# EAGLE board Transceiver Module Dev Board（without MCU）_V1.0 (EAGLE 9.6.2)
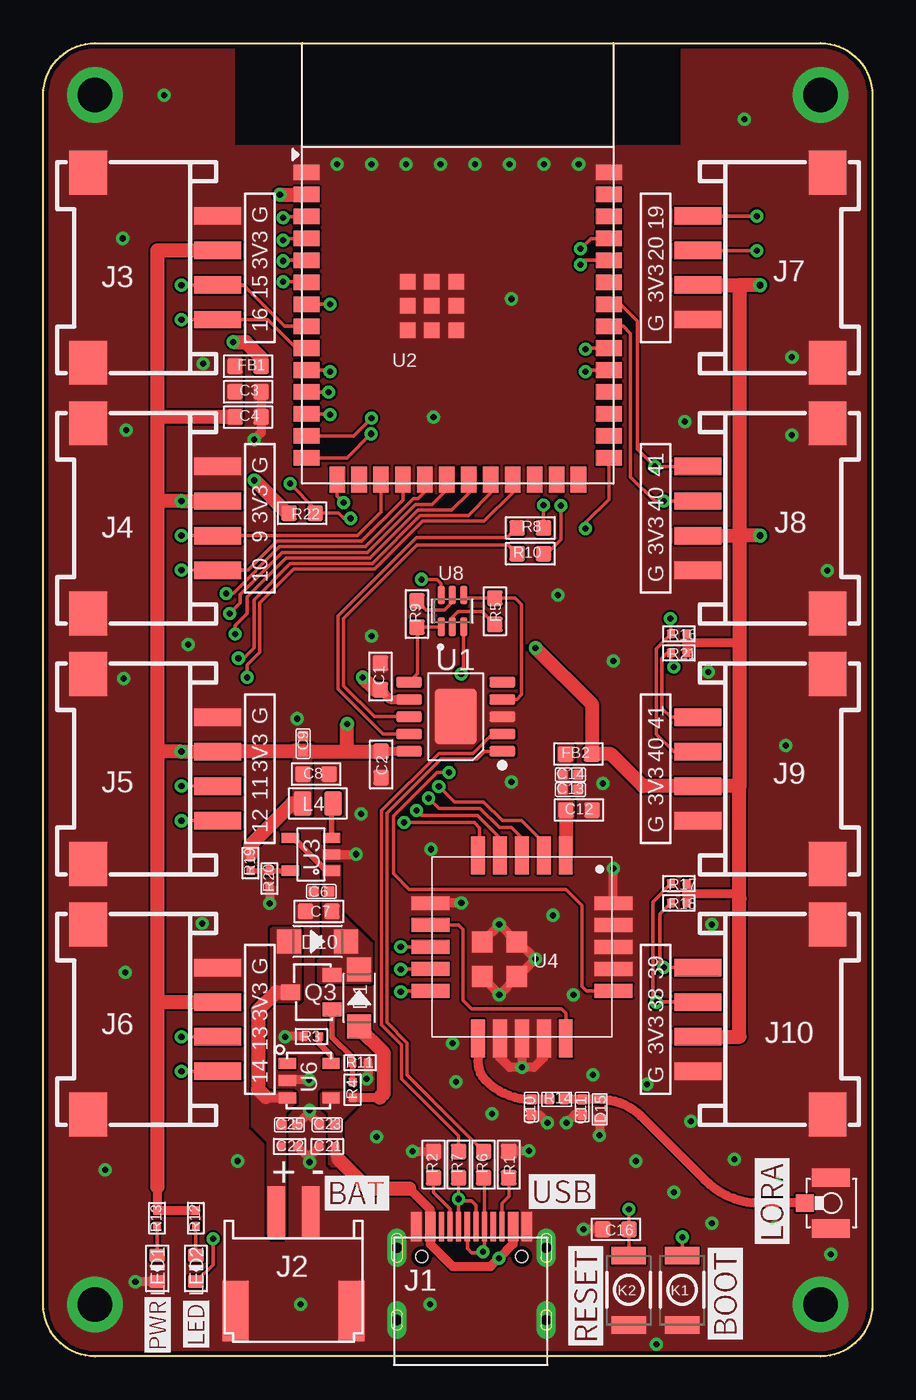
[diagram p0: board, top side]
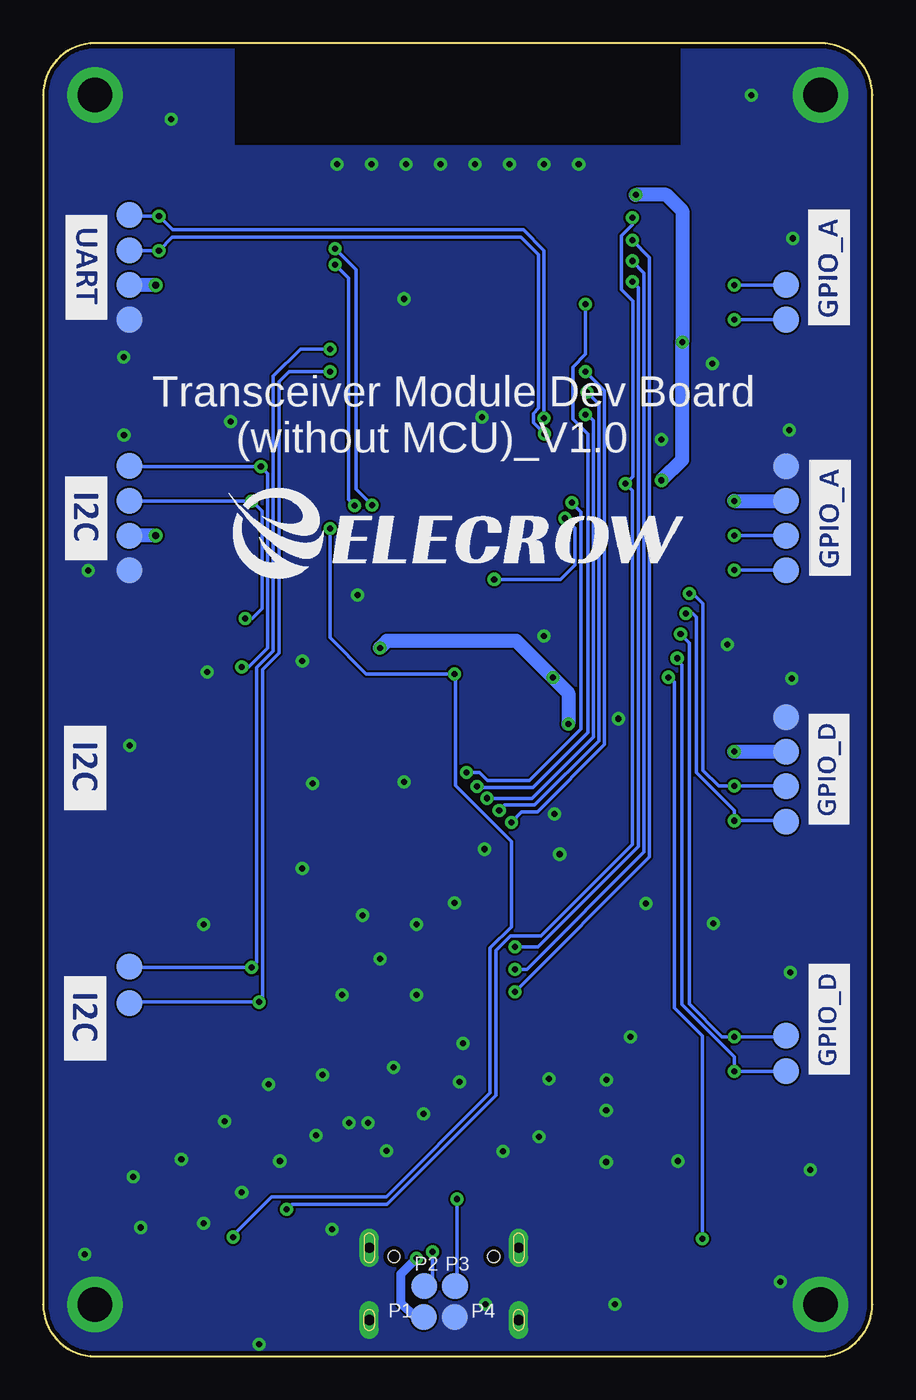
[diagram p1: board, bottom side, seen from below]

Size 48 x 76 mm. Coordinates in mm from the lower left corner, seen from the top.
Outline: 3,76 45,76 arc-90 48,73 48,3 arc-90 45,0 3,0 arc-90 0,3 0,73 arc-90 3,76
Copper layers (1*16): Top 0.035mm / dielectric 1.5mm / Bottom 0.035mm
Design rules "default": minimum track width 6mil, minimum drill 0.35mm, track to track 0.12mm, track to pad 6mil, pad to pad 6mil, via to via 6mil, smd to smd 6mil, copper to edge 10mil, drill to drill 6mil, minimum pad ring 10mil, minimum via ring 8mil, stop-mask expansion 4mil, vias tented up to drill 50mil, thermal gap 0mil
Net classes: 2 GND: width 0.203 mm

## Footprints (pad centres in the part's own frame; a part is rotated, then mirrored left to right if it is on the bottom)
C0603 = smd 0.889 x 0.889: 1 -0.762,0; 2 0.762,0
C0402 = smd 0.6 x 0.6: 1 -0.45,0; 2 0.45,0
0603 = smd 0.889 x 0.889: 1 -0.762,0; 2 0.762,0
0402 = smd 0.5 x 0.5: 1 -0.45,0; 2 0.45,0
D_SOD123FL = smd 1.397 x 1.397: + -1.651,0; - 1.651,0
0402-ESD = smd 0.5 x 0.7: 1 -0.58,0; 2 0.58,0
L0603 = smd 0.889 x 0.889: 1 -0.762,0; 2 0.762,0
USB-3.0TYPEC-SMD = smd 0.3 x 1.7: A1 -3.35,0.5; A4 -2.55,0.5; A5 -1.25,0.5; A6 -0.25,0.5; A7 0.25,0.5; A8 1.25,0.5; A9 2.55,0.5; A12 3.35,0.5; B1 3.05,0.5; B4 2.25,0.5; B5 1.75,0.5; B6 0.75,0.5; B7 -0.75,0.5; B8 -1.75,0.5; B9 -2.25,0.5; B12 -3.05,0.5 | drill 0.6 pad 1.016 long: P$1 -4.325,-0.72; P$2 4.325,-0.72; P$3 -4.325,-4.9; P$4 4.325,-4.9 | hole 0.68: -2.89,-1.22; 2.89,-1.22
PH2.0WT-2PIN = smd 1 x 3: P$1 -1,0; P$2 1,0 | smd 1.5 x 3.5: P$3 -3.35,-5.7; P$4 3.35,-5.7
CONNECTOR_4P-SMD-2.0-90D = smd 1.01 x 2.74: 1 -3,-0.1; 2 -1,-0.1; 3 1,-0.1; 4 3,-0.1 | smd 2.54 x 2.184: SS1 -5.5,7.4; SS2 5.5,7.4
157SW = smd 1.016 x 1.981: 1 0,0; 2 4,0
A9G_DISCRETE_L0805 = smd 1.016 x 1.397: 1 -0.889,0; 2 0.889,0
DISCRETE_LED-0603 = smd 0.762 x 0.889: + -0.762,0; - 0.762,0
MYSELF_IPEX1 = smd 1.05 x 1: P$1 0,0 | smd 2.2 x 1.05: P$2 1.525,-1.475; P$3 1.525,1.475
TEST_PAD-1.5MM = smd 1.5 x 1.5: P$1 0,0
SOT-23 = smd 1.1 x 0.8: 1 1.2,-1; 2 1.2,1 | smd 1.1 x 0.9: 3 -1.2,0
R0603-SP = smd 0.889 x 0.889: 1 -0.762,0; 2 0.762,0
R0402 = smd 0.635 x 0.635: 1 -0.445,0; 2 0.445,0
ESOP-10-EP-150MIL = smd 1.5 x 0.6: 1 -2.7,2; 2 -2.7,1; 3 -2.7,0; 4 -2.7,-1; 5 -2.7,-2; 6 2.7,-2; 7 2.7,-1; 8 2.7,0; 9 2.7,1; 10 2.7,2 | smd 2.4 x 3.2: EP 0,0
ESP32-S3-WROOM-1-SMD41 = smd 1.5 x 0.9: 1 -8.75,5.26; 2 -8.75,3.99; 3 -8.75,2.72; 4 -8.75,1.45; 5 -8.75,0.18; 6 -8.75,-1.09; 7 -8.75,-2.36; 8 -8.75,-3.63; 9 -8.75,-4.9; 10 -8.75,-6.17; 11 -8.75,-7.44; 12 -8.75,-8.71; 13 -8.75,-9.98; 14 -8.75,-11.25; 27 8.75,-11.25; 28 8.75,-9.98; 29 8.75,-8.71; 30 8.75,-7.44; 31 8.75,-6.17; 32 8.75,-4.9; 33 8.75,-3.63; 34 8.75,-2.36; 35 8.75,-1.09; 36 8.75,0.18; 37 8.75,1.45; 38 8.75,2.72; 39 8.75,3.99; 40 8.75,5.26 | smd 0.9 x 1.5: 15 -6.985,-12.5; 16 -5.715,-12.5; 17 -4.445,-12.5; 18 -3.175,-12.5; 19 -1.905,-12.5; 20 -0.635,-12.5; 21 0.635,-12.5; 22 1.905,-12.5; 23 3.175,-12.5; 24 4.445,-12.5; 25 5.715,-12.5; 26 6.985,-12.5 | smd 0.9 x 0.9: 41 -2.9,-1.06; 42 -1.5,-1.06; 43 -0.1,-1.06; 44 -2.9,-2.46; 45 -1.5,-2.46; 46 -0.1,-2.46; 47 -2.9,-3.86; 48 -1.5,-3.86; 49 -0.1,-3.86
CROWBOT_-V1.0-20220525_A_XBJ_SOT23-5 = smd 0.6 x 1: 1 -0.95,-1.2; 2 0,-1.2; 3 0.95,-1.2; 4 0.95,1.2; 5 -0.95,1.2
LR1262_LRCC68_MD_10*10MM = smd 2.2 x 0.8: P$1 -5.3,2.54; P$2 -5.3,1.27; P$3 -5.3,0; P$4 -5.3,-1.27; P$5 -5.3,-2.54; P$11 5.3,-2.54; P$12 5.3,-1.27; P$13 5.3,0; P$14 5.3,1.27; P$15 5.3,2.54 | smd 0.8 x 2.2: P$6 -2.54,-5.3; P$7 -1.27,-5.3; P$8 0,-5.3; P$9 1.27,-5.3; P$10 2.54,-5.3; P$16 2.54,5.3; P$17 1.27,5.3; P$18 0,5.3; P$19 -1.27,5.3; P$20 -2.54,5.3 | smd 1.2 x 1.2: P$21 -0.3,-0.3; P$22 1.7,-0.3; P$23 -0.3,-2.3; P$24 1.7,-2.3
DFN8_SOP23-5 = smd 1 x 0.635: 1 -1.27,1; 2 -1.27,0; 3 -1.27,-1; 4 1.27,-1; 5 1.27,1
SOP65P210X100-6N = smd 1.09 x 0.4: 1 -0.92,0.65; 2 -0.92,0; 3 -0.92,-0.65; 4 0.92,-0.65; 5 0.92,0; 6 0.92,0.65

## Placement (x,y rotation side)
C1  1uF  [C0603]  19.52,39.35 270 top
C2  1uF  [C0603]  19.56,34.25 90 top
C3  10uF  [C0603]  11.86,55.83 180 top
C4  100nF  [C0603]  11.86,54.36 180 top
C6  100nF  [C0402]  16.1,26.9 180 top
C7  22uF  [0603]  15.95,25.75 0 top
C8  22uF  [0603]  15.8,33.7 180 top
C9  100nF  [C0402]  15.04,35.46 90 top
C10  NC  [C0402]  28.26,14.42 270 top
C11  NC  [C0402]  31.2,14.42 270 top
C12  10uF/0603  [C0603]  31.01,31.62 0 top
C13  100nF  [C0402]  30.52,32.8 0 top
C14  47pF  [C0402]  30.52,33.66 0 top
C16  1uF  [C0603]  33.15,7.35 0 top
C21  10uF  [0402]  16.45,12.15 0 top
C22  10uF  [0402]  14.26,12.15 180 top
C23  100nF  [C0402]  16.44,13.4 180 top
C25  100nF  [C0402]  14.25,13.4 0 top
D1  DSS34  [D_SOD123FL]  18.29,20.74 90 top
D10  DSS34  [D_SOD123FL]  15.89,24.01 0 top
D15  LXES15AAA1-153  [0402-ESD]  32.22,14.3 90 top
FB1  0R/800mA  [L0603]  11.86,57.3 0 top
FB2  120R/2A/BLM18PG121SN1D  [L0603]  30.99,34.86 180 top
J1  TYPEC-3.0-16P-SMD  [USB-3.0TYPEC-SMD]  24.8,7 0 top
J2  PH2.0WT-2PIN  [PH2.0WT-2PIN]  14.5,8.33 0 top
J3  [CONNECTOR_4P-SMD-2.0-90D]  10,63 90 top
J4  [CONNECTOR_4P-SMD-2.0-90D]  10,48.5 90 top
J5  [CONNECTOR_4P-SMD-2.0-90D]  10,34 90 top
J6  [CONNECTOR_4P-SMD-2.0-90D]  10,19.5 90 top
J7  [CONNECTOR_4P-SMD-2.0-90D]  38,63 270 top
J8  [CONNECTOR_4P-SMD-2.0-90D]  38,48.5 270 top
J9  [CONNECTOR_4P-SMD-2.0-90D]  38,34 270 top
J10  [CONNECTOR_4P-SMD-2.0-90D]  38,19.5 270 top
K1  BUTTON  [157SW]  36.99,1.82 90 top
K2  BUTTON  [157SW]  33.89,1.82 90 top
L4  4.7uH/1.6A  [A9G_DISCRETE_L0805]  15.9,32 180 top
LED1  RED  [DISCRETE_LED-0603]  6.6,5.09 270 top
LED2  BLUE  [DISCRETE_LED-0603]  8.84,5.09 270 top
LR_ANT  C5137195  [MYSELF_IPEX1]  44.08,8.87 0 top
P1  TEST_PADPAD-1.5MM  [TEST_PAD-1.5MM]  25.96,2.26 0 bottom
P2  TEST_PADPAD-1.5MM  [TEST_PAD-1.5MM]  25.95,4.07 0 bottom
P3  TEST_PADPAD-1.5MM  [TEST_PAD-1.5MM]  24.16,4.07 0 bottom
P4  TEST_PADPAD-1.5MM  [TEST_PAD-1.5MM]  24.17,2.27 0 bottom
P5  TEST_PAD  [TEST_PAD-1.5MM]  5,51.5 0 bottom
P6  TEST_PAD  [TEST_PAD-1.5MM]  5,49.5 0 bottom
P7  TEST_PAD  [TEST_PAD-1.5MM]  5,47.5 0 bottom
P8  TEST_PAD  [TEST_PAD-1.5MM]  5,45.5 0 bottom
P9  TEST_PAD  [TEST_PAD-1.5MM]  5,62 0 bottom
P10  TEST_PAD  [TEST_PAD-1.5MM]  5,60 0 bottom
P11  TEST_PAD  [TEST_PAD-1.5MM]  43,45.5 0 bottom
P12  TEST_PAD  [TEST_PAD-1.5MM]  43,47.5 0 bottom
P13  TEST_PAD  [TEST_PAD-1.5MM]  43,49.5 0 bottom
P14  TEST_PAD  [TEST_PAD-1.5MM]  43,60 0 bottom
P15  TEST_PAD  [TEST_PAD-1.5MM]  43,62 0 bottom
P16  TEST_PAD  [TEST_PAD-1.5MM]  43,64 0 bottom
P17  TEST_PAD  [TEST_PAD-1.5MM]  43,66.05 0 bottom
P18  TEST_PAD  [TEST_PAD-1.5MM]  5,37 0 bottom
P19  TEST_PAD  [TEST_PAD-1.5MM]  5,35 0 bottom
P20  TEST_PAD  [TEST_PAD-1.5MM]  5,33 0 bottom
P21  TEST_PAD  [TEST_PAD-1.5MM]  5,30.95 0 bottom
P22  TEST_PAD  [TEST_PAD-1.5MM]  5,18.55 0 bottom
P23  TEST_PAD  [TEST_PAD-1.5MM]  5,16.5 0 bottom
P24  TEST_PAD  [TEST_PAD-1.5MM]  43,51.55 0 bottom
P25  TEST_PAD  [TEST_PAD-1.5MM]  43,20.45 0 bottom
P26  TEST_PAD  [TEST_PAD-1.5MM]  43,22.55 0 bottom
Q3  PMOS-3401-4A  [SOT-23]  15.53,21.07 0 top
R1  5.1K  [R0603-SP]  26.95,11.1 90 top
R2  5.1K  [R0603-SP]  22.6,11.1 270 top
R3  2K  [0402]  15.53,18.51 0 top
R4  1K  [0402]  17.91,15.43 270 top
R5  10K  [R0603-SP]  26.15,43.12 90 top
R6  0R  [R0603-SP]  25.5,11.1 270 top
R7  0R  [R0603-SP]  24.05,11.1 270 top
R8  0R  [R0603-SP]  28.2,47.95 180 top
R9  10K  [R0603-SP]  21.63,42.96 270 top
R10  0R  [R0603-SP]  28.2,46.45 180 top
R11  10K  [0402]  18.35,16.99 180 top
R12  4.7K  [0402]  8.83,7.99 90 top
R13  4.7K  [0402]  6.59,7.99 90 top
R14  0R  [R0402]  29.73,14.87 0 top
R16  10K  [0402]  36.8,41.81 0 top
R17  10K  [0402]  36.8,27.36 0 top
R18  10K  [0402]  36.8,26.24 0 top
R19  45.3K  [0402]  12,28.55 90 top
R20  10K  [0402]  13.1,27.65 90 top
R21  10K  [0402]  36.8,40.71 0 top
R22  10K  [R0603-SP]  14.99,48.8 0 top
U1  CH340K  [ESOP-10-EP-150MIL]  23.88,37.02 180 top
U2  ESP32-S3-WROOM-1  [ESP32-S3-WROOM-1-SMD41]  24,63.25 0 top
U3  RY3420  [CROWBOT_-V1.0-20220525_A_XBJ_SOT23-5]  15.5,29.05 90 top
U4  [LR1262_LRCC68_MD_10*10MM]  27.71,23.69 270 top
U6  DFN8_4054A  [DFN8_SOP23-5]  15.4,15.96 0 top
U8  UMH3NTN  [SOP65P210X100-6N]  23.69,43.14 90 top

## Library data of the parts
C1-C4 C16 D1 D10 FB1 J1 P1-P4 R1 R2 R5-R10 R22 U2 = CrowPanel_Advance_HMI
C6 C9-C11 C13 C14 C23 C25 = SX1302_Module
C7 C8 C21 C22 R3 R4 R11-R13 R16-R21 = WGH
C12 = Lora_Basic_Gateway_ Module
D15 = WM1302_Raspberry_Pi _Hat
FB2 R14 = LoraWAN_Gateway_Mainboard
J2 = cooper
J3-J10 LED1 LED2 = A_xbj
K1 K2 = MySMD
L4 = ESP32-S3 4.2“ EINK V1.3
LR_ANT = NBIOT
P5-P26 = A7670X_4G_PCIE
Q3 = DFN8
U1 = sale
U3 U6 = CrowPanel ESP32 Display-4.3-inch-V2.1-20240314
U4 = LORA_LR1110_0.0
U8 = UMH3NTN; AVAILABILITY: In Stock; CHECK_PRICES: https://www.snapeda.com/parts/UMH3NTN/Rohm/view-part/?ref=eda; DESCRIPTION: Pre-Biased Bipolar Transistor (BJT) 2 NPN - Pre-Biased (Dual) 50V 100mA 250MHz 150mW Surface Mount UMT6; MF: Rohm; MP: UMH3NTN; PACKAGE: SOT-363 Rohm; PRICE: None; PURCHASE-URL: https://www.snapeda.com/api/url_track_click_mouser/?unipart_id=355768&manufacturer=Rohm&part_name=UMH3NTN&search_term=umh3n; SNAPEDA_LINK: https://www.snapeda.com/parts/UMH3NTN/Rohm/view-part/?ref=snap

## Nets
3V3: C1.2 C2.2 C3.2 C4.2 C8.2 C9.1 FB1.1 FB2.1 J3.3 J4.3 J5.3 J6.3 J7.3 J8.3 J9.3 J10.3 L4.2 P6.P$1 P12.P$1 P15.P$1 P19.P$1 R12.2 R13.2 R16.2 R17.2 R18.2 R19.2 R21.2 U1.7 U1.10
+VBUS: C21.2 C23.1 D1.+ J1.A4 J1.A9 J1.B4 J1.B9 P1.P$1 R4.2 U6.4
ANT: C10.1 R14.1 U4.P$11
BAT+: C22.2 C25.1 D10.+ J2.P$1 Q3.3 U6.3
CH_EN: C16.2 K2.2 R22.2 U2.3 U8.6
DIO2: U4.P$7 U4.P$15
DTR: R5.2 U1.4 U8.4
ESP_3V3: FB1.2 R22.1 U2.2
ESP_RXD0: R10.1 U2.36
ESP_TXD0: R8.1 U2.37
GND: C1.1 C2.1 C3.1 C4.1 C6.2 C7.1 C8.1 C9.2 C10.2 C11.2 C12.2 C13.2 C14.2 C16.1 C21.1 C22.1 C23.2 C25.2 D15.1 J1.A1 J1.A12 J1.B1 J1.B12 J1.P$1 J1.P$2 J1.P$3 J1.P$4 J2.P$2 J2.P$3 J2.P$4 J3.4 J3.SS1 J3.SS2 J4.4 J4.SS1 J4.SS2 J5.4 J5.SS1 J5.SS2 J6.4 J6.SS1 J6.SS2 J7.4 J7.SS1 J7.SS2 J8.4 J8.SS1 J8.SS2 J9.4 J9.SS1 J9.SS2 J10.4 J10.SS1 J10.SS2 K1.1 K2.1 LED1.- LR_ANT.P$2 LR_ANT.P$3 P4.P$1 P5.P$1 P11.P$1 P14.P$1 P18.P$1 R1.2 R2.1 R3.1 R11.1 R20.1 U1.3 U1.EP U2.1 U2.40 U2.41 U2.42 U2.43 U2.44 U2.45 U2.46 U2.47 U2.48 U2.49 U3.2 U4.P$6 U4.P$12 U4.P$13 U4.P$14 U4.P$17 U4.P$18 U4.P$19 U4.P$20 U4.P$21 U4.P$22 U4.P$23 U4.P$24 U6.2
IO0_BOOT: K1.2 U2.27 U8.3
IO3_R6: U2.15 U4.P$16
IO4_LR_NRESET: U2.4 U4.P$10
IO5_LR_BUSY: U2.5 U4.P$9
IO6_LR_DIO1: U2.6 U4.P$8
IO7_NSS: U2.7 U4.P$2
IO8_SPI_SCK: U2.12 U4.P$3
IO9_G_A2: J4.2 P7.P$1 U2.17
IO10_G_A2: J4.1 P8.P$1 U2.18
IO11_G_D1: J5.2 P20.P$1 U2.19
IO12_G_D1: J5.1 P21.P$1 U2.20
IO13_G_D2: J6.2 P22.P$1 U2.21
IO14_G_D2: J6.1 P23.P$1 U2.22
IO15_G_A1: J3.2 P9.P$1 U2.8
IO16_G_A1: J3.1 P10.P$1 U2.9
IO17_SPI_MISO: U2.10 U4.P$5
IO18_SPI_MOSI: U2.11 U4.P$4
IO19_UART_RX: J7.1 P17.P$1 U2.13
IO20_UART_TX: J7.2 P16.P$1 U2.14
IO21_LED: LED2.- U2.23
IO38_SDA_1: J10.2 P25.P$1 R17.1 U2.31
IO39_SCL_1: J10.1 P26.P$1 R18.1 U2.32
IO40_SDA_0: J8.2 J9.2 P13.P$1 R16.1 U2.33
IO41_SCL_0: J8.1 J9.1 P24.P$1 R21.1 U2.34
LR_3V3: C12.1 C13.1 C14.1 FB2.2 U4.P$1
N$1: J1.B5 R1.1
N$2: J1.A5 R2.2
N$3: Q3.1 R4.1 R11.2
N$5: R6.1 U1.1
N$6: R7.1 U1.2
N$7: R5.1 U8.2
N$8: R9.1 U8.5
N$10: R8.2 U1.9
N$11: R10.2 U1.8
N$12: LED2.+ R12.1
N$13: L4.1 U3.3
N$15: LED1.+ R13.1
N$17: C11.1 D15.2 LR_ANT.P$1 R14.2
N$20: R19.1 R20.2 U3.5
N$22: R3.2 U6.5
RTS: R9.2 U1.6 U8.1
USB_D+: J1.A6 J1.B6 P2.P$1 R6.2
USB_D-: J1.A7 J1.B7 P3.P$1 R7.2
VIN: C6.1 C7.2 D1.- D10.- Q3.2 U3.1 U3.4

## Tracks (layer width: path | path; a pad name or v marks a point on that pad's centre or on a via)
3V3  (via drill 0.35, 0.4)
  Top 0.508: U1.10 C2.2 | R12.2 R13.2 6.6,9.8 | R16.2 37.25,41.3 | 37.25,41.3 R21.2 | 37.25,41.3 40.3,41.3 | R17.2 37.25,26.8 | 37.25,26.8 R18.2 | 37.25,26.8 40.3,26.8 40.3,26.5 | C1.2 20.09,38.02 U1.7
  Top 0.813: J3.3 6.6,64 6.6,54.4 | 6.6,54.4 6.6,49.5 | 6.6,49.5 6.6,35 | 6.6,35 6.6,20.5 | 6.6,20.5 J6.3 | 6.6,49.5 v8,49.5 J4.3 | 6.6,35 v8,35 9.6,35 | 9.6,35 J5.3 | 6.6,20.5 6.6,9.8 | R19.2 12,29.6 14.4,32 L4.2 | 9.6,35 9.61,35.01 C9.1 17.6,35.01 | J7.3 40.3,62 | 40.3,62 40.3,47.5 | J8.3 40.3,47.5 | 40.3,47.5 40.3,41.3 40.3,33 | 40.3,33 J9.3 34.71,33 32.85,34.86 FB2.1 31.75,37.75 v28.5,41 | J10.3 40.3,18.5 40.3,26.5 40.3,33 | v41.5,47.5 40.3,47.5 | v41.5,62 40.3,62 | C4.2 6.64,54.36 6.6,54.4 | 17.6,35.01 17.8,35.01 C2.2 | 17.6,35.01 v17.6,36.6 | v18.5,39.29 19.2,38.59 C1.2
  Bottom 0.813: v8,49.5 P6.P$1 | v8,35 P19.P$1 | v17.6,36.6 17.6,38.39 v18.5,39.29 20.61,41.4 28.1,41.4 v28.5,41 | v41.5,47.5 P12.P$1 | v41.5,62 P15.P$1
  pour Top (no thermals): 10.7,57.8 11.4,57.8 11.5,57.7 11.5,54 11.4,53.9 10.7,53.9 10.6,54 10.6,57.7
  pour Top (no thermals): 14.5,31.4 14.5,35.4 15.5,35.4 15.5,31.4 15.4,31.3 14.6,31.3
+VBUS  (via drill 0.35)
  Top 0.152: 22.4,7.35 J1.B9 J1.A4 22.4,7.65 22.4,8.2
  Top 0.2: 22.4,7.35 22.4,6.8 | 27.2,7.35 J1.A9
  Top 0.203: J1.A9 J1.B4
  Top 0.508: 22.4,6.8 22.4,6.5 23.7,5.2 25.9,5.2 v26.38,5.68 27.2,6.5 27.2,7.35 | 22.4,8.2 22.4,8.5 21.2,9.7 | R4.2 19.48,14.98 | C21.2 16.9,11.6 17.11,11.39
  Top 0.813: 21.2,9.7 18.8,9.7 17.11,11.39 | 19.48,14.98 19.73,15.23 19.73,17.55 18.29,18.99 D1.+
  Bottom 0.508: v26.38,5.68 27.3,4.76 27.3,3.1 26.46,2.26 P1.P$1
  pour Top (no thermals): 16.55,11.15 16.55,14.05 16.1,14.5 16.1,15.2 16.2,15.3 18.2,15.3 18.3,15.2 18.3,14.7 17.27,13.67 17.27,11 16.7,11
ANT
  Top 0.508: R14.1 C10.1 arc-45 25.62,15.96 arc-45 25.17,17.05 U4.P$11
BAT+
  Top 0.508: 12.9,15 12.94,14.96 U6.3
  Top 0.813: Q3.3 13.47,21.07 12.44,20.04 12.44,15.46 12.9,15
  pour Top (no thermals): 13.3,6.8 13,7.1 13,12.4 12.1,13.3 12.1,15.1 12.3,15.3 14.4,15.3 14.6,15.1 14.6,14.7 14,14.1 14,7 13.8,6.8
  pour Top (no thermals): 13.3,24.8 14.8,24.8 14.9,24.7 14.9,20.7 14.7,20.5 13.2,20.5 13.2,24.7
CH_EN  (via drill 0.35)
  Top 0.203: U8.6 23.04,44.72 22.79,44.97 v21.89,44.97 | C16.2 33.91,7.2 | 33.91,7.2 33.91,5.84 K2.2 | v17.8,48.5 17.41,48.5 17.11,48.8 R22.2 15.75,49.05 v14.3,50.5 | U2.3 13.97,65.97 v13.9,65.9 | v33.9,8.5 33.9,7.21 33.91,7.2
  Bottom 0.203: v21.89,44.97 18.05,44.97 17.22,45.8 17.22,47.92 v17.8,48.5 | v13.9,65.9 13.9,65.49 14.53,64.86 14.53,61.73 13.87,61.07 13.87,50.93 v14.3,50.5 13.9,50.1 13.9,29.61 19.18,24.33 20.96,24.33 21.8,23.49 21.8,15.1 28.1,8.8 33.6,8.8 v33.9,8.5
DIO2
  Top 0.203: U4.P$7 24.04,24.96 24.3,24.7 24.3,20.6 24.8,20.1 30,20.1 30.25,19.85 U4.P$15
DTR
  Top 0.203: U8.4 24.52,43.88 R5.2 26.17,43.9 27.3,43.9 27.7,43.5 27.7,38.3 27.42,38.02 U1.4
ESP_3V3  (via drill 0.35)
  Top 0.508: 12.23,50.7 v12.2,50.7
  Top 0.813: FB1.2 12.62,57.8 11.72,58.7 v11,58.7 | v13.7,67.23 v13.71,67.24 U2.2 | R22.1 14.13,48.8 12.23,50.7
  Bottom 0.813: v13.7,67.23 11.93,67.23 11,66.3 v11,58.7 11,51.9 v12.2,50.7
ESP_RXD0  (via drill 0.35)
  Top 0.203: v29.98,49.25 29.98,47.28 29.15,46.45 R10.1 | v31.1,63.19 31.34,63.43 U2.36
  Bottom 0.203: v29.98,49.25 30.32,49.59 30.32,62.41 v31.1,63.19
ESP_TXD0  (via drill 0.35)
  Top 0.203: v28.97,49.26 R8.1 | v31.1,64.1 31.7,64.7 U2.37
  Bottom 0.203: v28.97,49.26 29.9,50.19 29.9,62.9 v31.1,64.1
GND  (via drill 0.35, 2 pad 3.2)
  Top 0.508: U4.P$14 28.98,17.29 28.41,16.72 v27.71,16.72 | U4.P$13 v27.71,16.72 | v27.71,16.72 27.01,16.72 26.44,17.29 U4.P$12 | D15.1 v32.22,12.79 v32.21,12.78 | C11.2 30.77,13.98 v30.3,13.5 | C10.2 28.73,13.97 v29.2,13.5 | U4.P$24 25.41,21.95 26.4,20.96 v26.4,20.93 27.41,21.94 U4.P$22 27.49,21.99 v28.49,22.99 27.49,23.99 U4.P$21 v26.4,25 26.4,24.98 U4.P$23 | v24.2,26.23 U4.P$6 | U4.P$20 v33.01,28.22 v33,28.23 | C3.1 C4.1 12.62,53.46 v12.22,53.06 | U3.2 v18.09,29.05 v18.1,29.06 | R3.1 v14.01,18.51 v14,18.5 | v15.4,16 14.17,16 U6.2 | R11.1 18.8,16.15 v18.72,16.07 | C25.2 15.41,14.11 v15.41,14.24 15.41,13.98 C23.2 | C22.1 15.41,11.45 v15.41,11.24 15.41,11.56 C21.1 | LED1.- v5.34,4.32 | C16.1 v31.28,7.35 | v21.38,11.87 R2.1 | v28.12,11.88 28.1,11.86 R1.2 | R20.1 v13.1,26.2
  other vias: 3,73 3,3 45,73 45,3 17,69 19,69 21,69 23,69 25,69 27,69 29,69 31,69 42.8,10.4 34.3,11.3 38.7,7.7 40,11.4 25.99,14.04 30.7,20.93 29.5,25.53 18.41,31.39 36.5,9.5 7,73 4.6,64.7 37.5,13.6 23.7,18.1 43.33,53.33 23.9,15.88 31.83,16.3 42.35,7.45 45.6,5.9 35.5,0.7 14.9,3 3.6,10.8 4.75,22.23 19.3,12.7 43.35,57.84 34.95,15.74 45.4,45.49 4.81,53.61 4.66,39.23 22.4,3 9.2,25.05 11.25,11.3 38.7,25 43,35.35 38.5,39.6 40.6,71.6 37.15,54.1 29.8,44.05 33,40.25 27.1,61.2 9.25,57.45 8.4,41.2 22.6,54.35 19,41.7 14.7,36.9 32.4,33.15 27.1,33.25 22.45,29.35
  pour Top (rank 6, no thermals): 0,76 11,76 11,70 37,70 37,76 48,76 48,0 0,0
  pour Bottom (rank 6, no thermals): 0,76 11,76 11,70 37,70 37,76 48,76 48,0 0,0
IO0_BOOT  (via drill 0.35)
  Top 0.203: v37,6.9 37,5.83 K1.2 | U8.3 24.34,39.64 v24.2,39.5 | U2.27 32.75,49.6 31.4,48.25 v31.4,47.9
  Bottom 0.203: v37,6.9 37,6.99 34.77,9.23 28.13,9.23 22.12,15.23 22.12,23.63 20.9,24.85 20.9,29.81 24.13,33.04 24.13,39.43 v24.2,39.5 29.3,39.5 31.4,41.6 v31.4,47.9
IO3_R6  (via drill 0.35)
  Top 0.203: U4.P$16 31.45,21.15 31.2,21.4 31.2,26.1 30.26,27.04 21.16,27.04 20.27,27.93 20.27,31.26 22.81,33.8 v23.5,33.8 | v17.4,49.4 17.02,49.78 U2.15
  Bottom 0.203: v23.5,33.8 22.75,33.8 22.27,33.32 19.85,33.32 16.86,36.31 16.86,48.86 v17.4,49.4
IO4_LR_NRESET  (via drill 0.35)
  Top 0.203: U2.4 14,64.7 v13.9,64.6 | v20.7,21.1 20.75,21.15 U4.P$10
  Bottom 0.203: v20.7,21.1 v20.69,21.1 12.9,28.89 12.9,63.6 v13.9,64.6
IO5_LR_BUSY  (via drill 0.35)
  Top 0.203: U2.5 13.93,63.43 v13.9,63.4 | v20.7,22.4 20.72,22.42 U4.P$9
  Bottom 0.203: v13.9,63.4 13.9,63.38 13.22,62.7 13.22,29.18 20,22.4 v20.7,22.4
IO6_LR_DIO1  (via drill 0.35)
  Top 0.203: U2.6 15.21,62.2 v13.9,62.2 | v20.7,23.7 U4.P$8
  Bottom 0.203: v13.9,62.2 13.55,61.85 13.55,29.51 19.36,23.7 v20.7,23.7
IO7_NSS  (via drill 0.35)
  Top 0.203: U2.7 v16.59,60.89 v16.6,60.9 | v22.9,32.99 23.8,32.09 25.5,32.09 26.59,31 27.7,31 28.98,29.72 U4.P$2
  Bottom 0.203: v16.6,60.9 16.6,57.99 17.33,57.26 17.33,54.24 16.48,53.39 16.48,36.09 19.64,32.93 22.84,32.93 v22.9,32.99
IO8_SPI_SCK  (via drill 0.35)
  Top 0.203: U2.12 16.56,54.54 v16.6,54.5 | v22.3,32.3 22.9,31.7 25.3,31.7 26.4,30.6 27.1,30.6 27.71,29.99 U4.P$3
  Bottom 0.203: v16.6,54.5 16.5,54.5 16.16,54.16 16.16,35.86 19.71,32.3 v22.3,32.3
IO9_G_A2  (via drill 0.35)
  Top 0.203: v8,47.5 J4.2 18.2,47.5 19.55,48.86 U2.17
  Bottom 0.203: v8,47.5 P7.P$1
IO10_G_A2  (via drill 0.35)
  Top 0.203: v8,45.5 J4.1 11.86,45.5 13.53,47.18 18.43,47.18 20.83,49.57 U2.18
  Bottom 0.203: v8,45.5 P8.P$1
IO11_G_D1  (via drill 0.35)
  Top 0.203: v8,33 J5.2 | v10.6,44.15 10.98,44.15 13.69,46.85 18.65,46.85 21.45,49.65 21.7,49.65 22.09,50.05 U2.19
  Bottom 0.203: v10.6,44.15 10.38,44.15 9.8,43.57 9.8,33.9 8.9,33 v8,33 P20.P$1
IO12_G_D1  (via drill 0.35)
  Top 0.203: v8,31 J5.1 | v10.8,42.99 11.4,43.59 11.4,44.1 13.83,46.53 18.79,46.53 21.56,49.3 22.5,49.3 23.37,50.17 U2.20
  Bottom 0.203: v10.8,42.99 10.39,42.99 10.2,42.8 10.2,33.8 8,31.6 v8,31 5.05,31 P21.P$1
IO13_G_D2  (via drill 0.35)
  Top 0.203: v8,18.5 J6.2 | v11.1,41.8 11.1,42.3 11.8,43 11.8,43.94 14.06,46.21 18.92,46.21 21.69,48.98 23.65,48.98 24.64,49.97 U2.21
  Bottom 0.203: v11.1,41.8 10.59,41.29 10.59,20.39 8.7,18.5 v8,18.5 5.05,18.5 P22.P$1
IO14_G_D2  (via drill 0.35)
  Top 0.203: v8,16.5 J6.1 | v11.3,40.4 11.6,40.4 12.2,41 12.2,43.78 14.3,45.88 19.05,45.88 21.83,48.65 24.61,48.65 25.91,49.95 U2.22
  Bottom 0.203: v11.3,40.4 11.3,40.3 11.02,40.02 11.02,20.37 8,17.34 v8,16.5 P23.P$1 | v11.3,40.4
IO15_G_A1  (via drill 0.35)
  Top 0.203: v8,62 J3.2 11.6,62 13.98,59.62 U2.8
  Bottom 0.203: v8,62 P9.P$1
IO16_G_A1  (via drill 0.35)
  Top 0.203: v8,60 10,60 | 10,60 J3.1 | U2.9 14.65,58.35 13,60 10,60
  Bottom 0.203: v8,60 P10.P$1
IO17_SPI_MISO  (via drill 0.35)
  Top 0.203: U2.10 16.52,57.08 v16.6,57 | U4.P$5 25.27,29.09 25.27,30.59 24.96,30.9 v20.9,30.9
  Bottom 0.203: v20.9,30.9 20.3,31.5 19.4,31.5 15.5,35.4 15.5,55.9 v16.6,57
IO18_SPI_MOSI  (via drill 0.35)
  Top 0.203: U2.11 v16.52,55.81 v16.53,55.8 | v21.6,31.6 21.9,31.3 25.13,31.3 26.44,29.99 U4.P$4
  Bottom 0.203: v16.53,55.8 15.83,55.1 15.83,35.62 19.56,31.9 21.3,31.9 v21.6,31.6
IO19_UART_RX  (via drill 0.35)
  Top 0.203: U2.13 17.97,53.27 v19,54.3 | v41.3,66 J7.1
  Bottom 0.203: v19,54.3 19,64 20.2,65.2 40.5,65.2 v41.3,66 42.95,66 P17.P$1
IO20_UART_TX  (via drill 0.35)
  Top 0.203: U2.14 17.59,52 v18.98,53.39 | v41.3,64 J7.2
  Bottom 0.203: v18.98,53.39 19.63,54.04 19.63,54.56 19.32,54.87 19.32,63.77 20.33,64.77 40.53,64.77 v41.3,64 P16.P$1
IO21_LED  (via drill 0.35)
  Top 0.203: LED2.- 8.87,4.33 9.84,5.3 v9.84,6.8 | U2.23 27.17,49.97 25.53,48.33 21.96,48.33 19.19,45.56 14.48,45.56 12.52,43.6 12.52,40.73 11.8,40.01 v11.8,39.3
  Bottom 0.203: v11.8,39.3 11.73,39.3 11.46,39.03 11.46,20.15 9.84,18.54 v9.84,6.8
IO38_SDA_1  (via drill 0.35)
  Top 0.203: R17.1 35.3,26.31 35.3,20.7 v35.5,20.5 J10.2 | U2.31 31.48,57.08 v31.4,57
  Bottom 0.203: v31.4,57 33.75,57 34.35,56.4 34.35,40.69 35.3,39.75 35.3,20.7 v35.5,20.5 42.95,20.5 P25.P$1
IO39_SCL_1  (via drill 0.35)
  Top 0.203: R18.1 35.7,25.59 35.7,22.7 35.9,22.5 v35.93,22.5 J10.1 | U2.32 31.45,58.35 v31.4,58.3
  Bottom 0.203: v31.4,58.3 33.1,58.3 34.68,56.72 34.68,40.83 35.63,39.87 35.63,22.8 v35.93,22.5 42.95,22.5 P26.P$1
IO40_SDA_0  (via drill 0.35)
  Top 0.203: U2.33 33.58,59.62 34,59.2 34,50.9 35.4,49.5 v35.93,49.5 J8.2 | J9.2 36.5,35 35.5,36 35.5,40.96 R16.1 36.35,42.65 v36.3,42.7
  Bottom 0.203: v36.3,42.7 35.9,42.7 35.32,43.28 35.32,48.92 35.9,49.5 v35.93,49.5 P13.P$1
IO41_SCL_0  (via drill 0.35)
  Top 0.203: U2.34 33.41,60.89 34.4,59.9 34.4,52.5 v35.4,51.5 J8.1 | J9.1 36.32,37 35.82,37.5 35.82,40.42 36.11,40.71 R21.1 36.35,40.05 v36.5,39.9
  Bottom 0.203: v36.5,39.9 36.1,39.9 35,41 35,51.1 v35.4,51.5 42.95,51.5 P24.P$1
LR_3V3
  Top 0.813: C12.1 U4.P$1
  pour Top (no thermals): 30.6,31.1 29.9,31.1 29.8,31.2 29.8,35.3 29.9,35.4 30.6,35.4 30.7,35.3 30.7,34.5 30.6,34.4 30.4,34.2 30.4,32.4 30.7,32.1 30.7,31.8 30.7,31.2
N$1
  Top 0.203: J1.B5 26.55,8.85 26.95,9.25 R1.1
N$2
  Top 0.203: J1.A5 23.55,8.55 22.6,9.5 R2.2
N$3
  Top 0.305: R4.1 R11.2 17.9,17.29 16.73,18.46 Q3.1
N$5
  Top 0.203: R6.1 21.07,16.29 21.07,18.15 19.91,19.31 19.91,31.45 23.03,34.58 25.11,34.58 25.56,35.02 U1.1
N$6
  Top 0.203: R7.1 24.05,12.76 20.75,16.06 20.75,18.02 19.59,19.18 19.59,31.59 22.9,34.9 24.88,34.9 26,36.02 U1.2
N$7
  Top 0.203: U8.2 23.69,42.79 24,43.1 25.41,43.1 R5.1
N$8
  Top 0.203: R9.1 22.15,43.2 23.23,43.2 23.69,43.66 U8.5
N$10
  Top 0.203: U1.9 19.68,36.02 17.08,38.62 17.08,42.85 21.6,47.37 26.86,47.37 R8.2
N$11
  Top 0.203: U1.8 19.18,37.02 17.4,38.8 17.4,42.72 21.63,46.95 26.94,46.95 R10.2
N$12
  Top 0.203: R12.1 8.83,5.86 LED2.+
N$13
  Top 0.305: L4.1 16.7,31.91 U3.3
N$15
  Top 0.203: R13.1 LED1.+
N$17
  Top 0.508: R14.2 C11.1 D15.2 32.26,14.88 arc-45 34.59,13.91 38.29,10.21 arc45 41.52,8.87 LR_ANT.P$1
N$20
  Top 0.305: U3.5 R20.2 R19.1
N$22
  Top 0.305: U6.5 16.67,17.42 15.98,18.11 R3.2
RTS
  Top 0.203: U8.1 23.02,42.2 R9.2 21.68,42.15 21.68,39.52 U1.6
USB_D+  (via drill 0.35)
  Top 0.203: J1.A6 24.55,6.25 24.8,6 25.4,6 v25.45,6.05 25.47,6.05 25.55,6.13 J1.B6 25.55,10.49
  Top 0.3: 25.55,10.49 R6.2
  Bottom 0.203: v25.45,6.05 25.45,4.57 P2.P$1
USB_D-  (via drill 0.35)
  Top 0.152: v24.05,9.1 24.05,9
  Top 0.203: J1.A7 25.05,8.75 24.8,9 24.05,9 | R7.2 v24.05,9.1 J1.B7
  Bottom 0.203: v24.05,9.1 24.05,4.18
  Bottom 0.3: 24.05,4.18 P3.P$1
VIN
  Top 0.305: U3.1 16.4,28.1 14.5,30 U3.4
  pour Top (no thermals): 16.2,23.2 16.2,28.3 16.3,28.4 17.2,28.4 17.2,25.7 19,23.9 19,21.7 18.9,21.6 16,21.6 15.9,21.7 15.9,22.9

## Text on the board
tPlace: 19 | G | 20 | 3V3 | 3V3 | 15 | G | 16 | 41 | G | 40 | 3V3 | 3V3 | 9 | G | 10 | 41 | G | 40 | 3V3 | 3V3 | 11 | G | 12 | 39 | G | 38 | 3V3 | 3V3 | 13 | G | 14 | + | -
bPlace: Transceiver Module Dev Board / (without MCU)_V1.0